# Altium PCB 6S1P-3V.PcbDoc
Units mm, origin at the board's own origin, x right, y up, seen from the top; angles counter-clockwise.
Board outline 74.99 x 72.5 mm, 2 copper layers (Top Layer, Bottom Layer); 9 components, 7 nets, 26 pads, 0 vias.
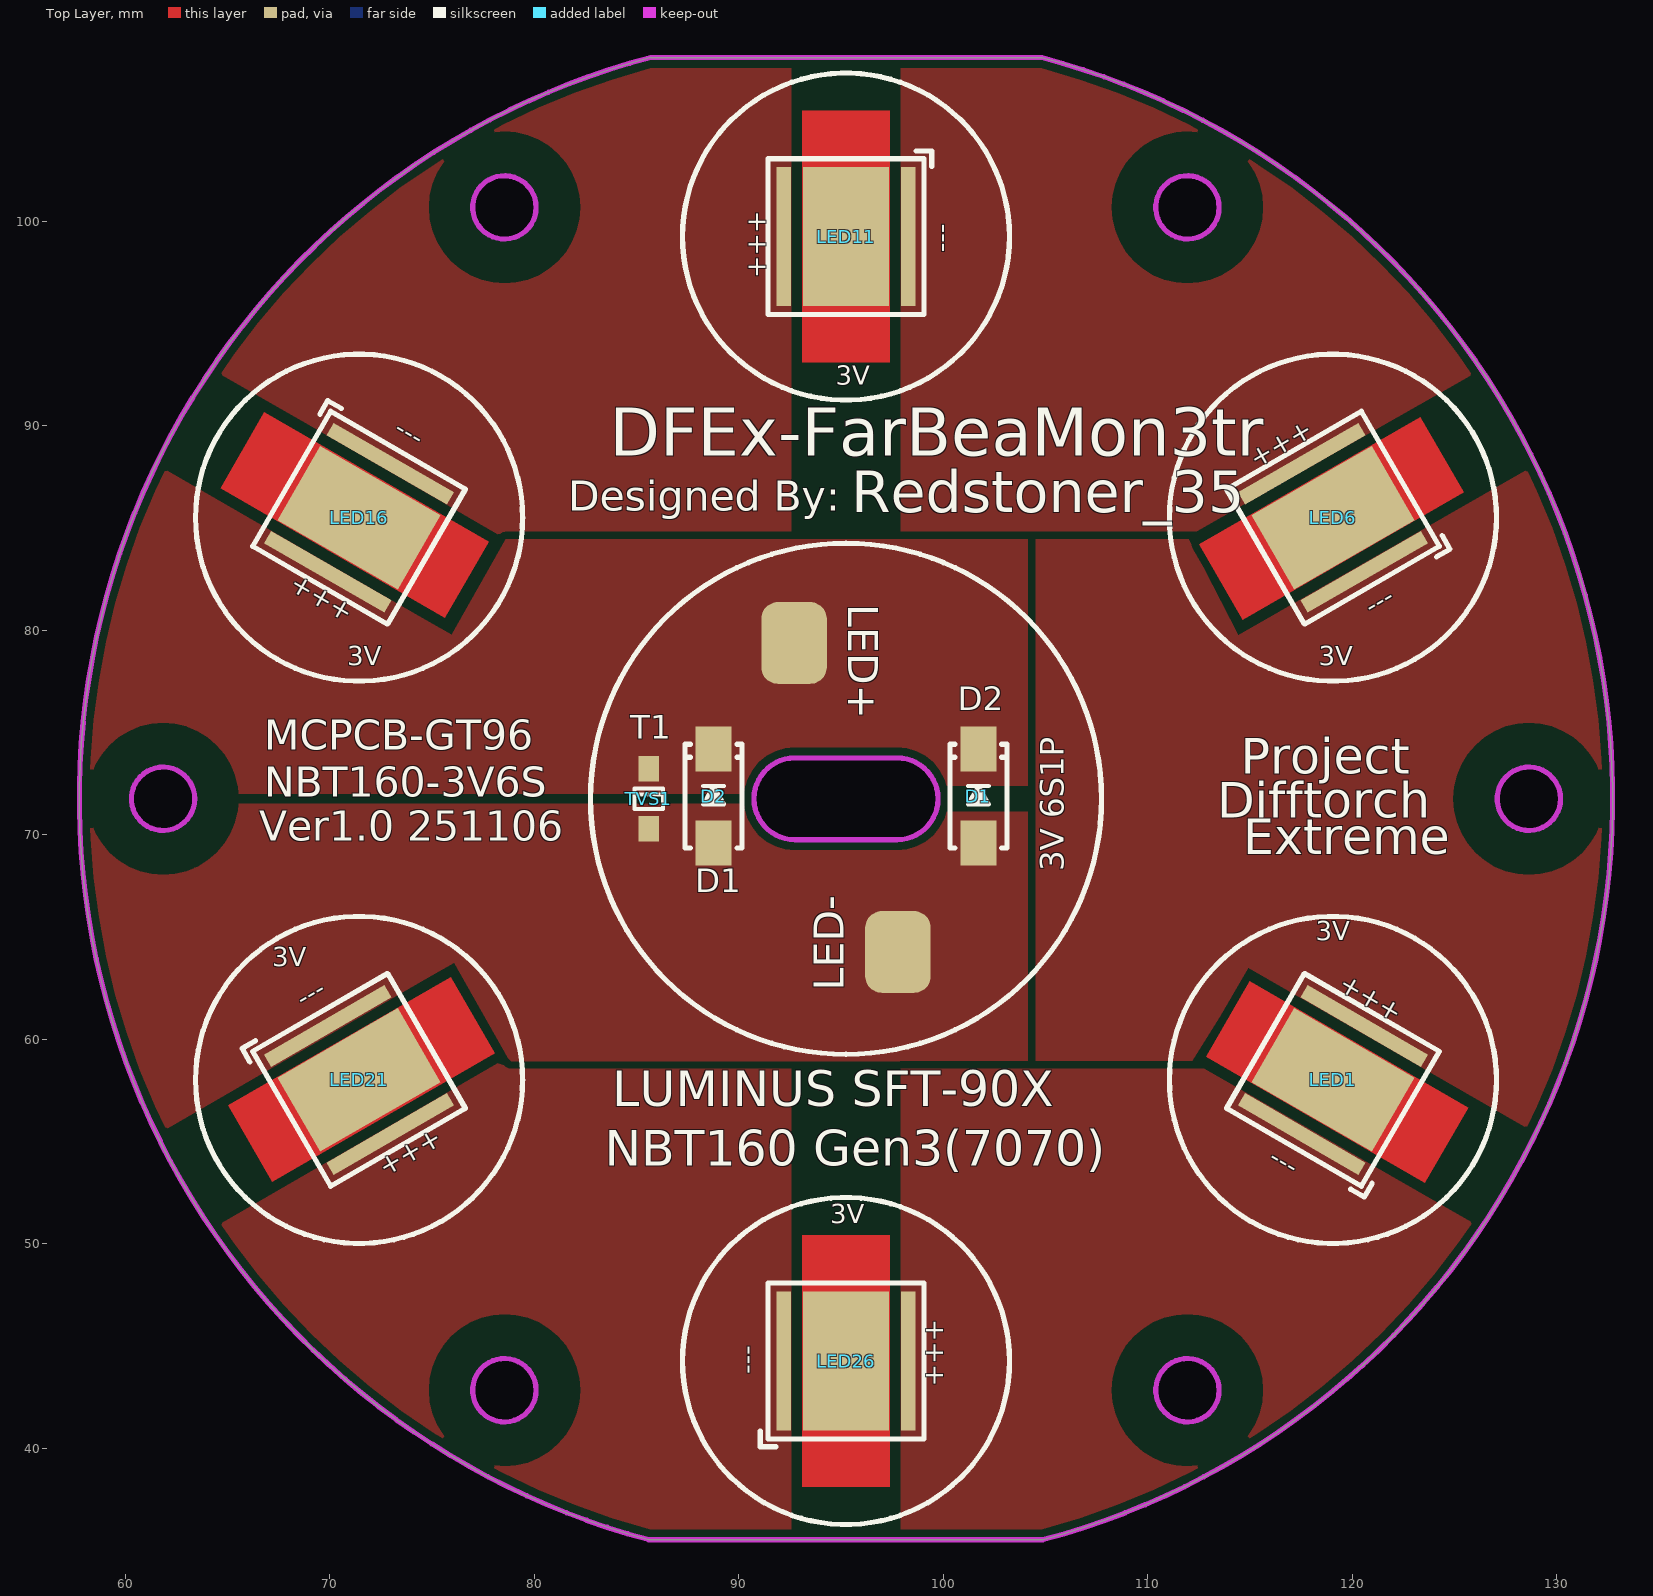
[diagram p0: Top Layer view]
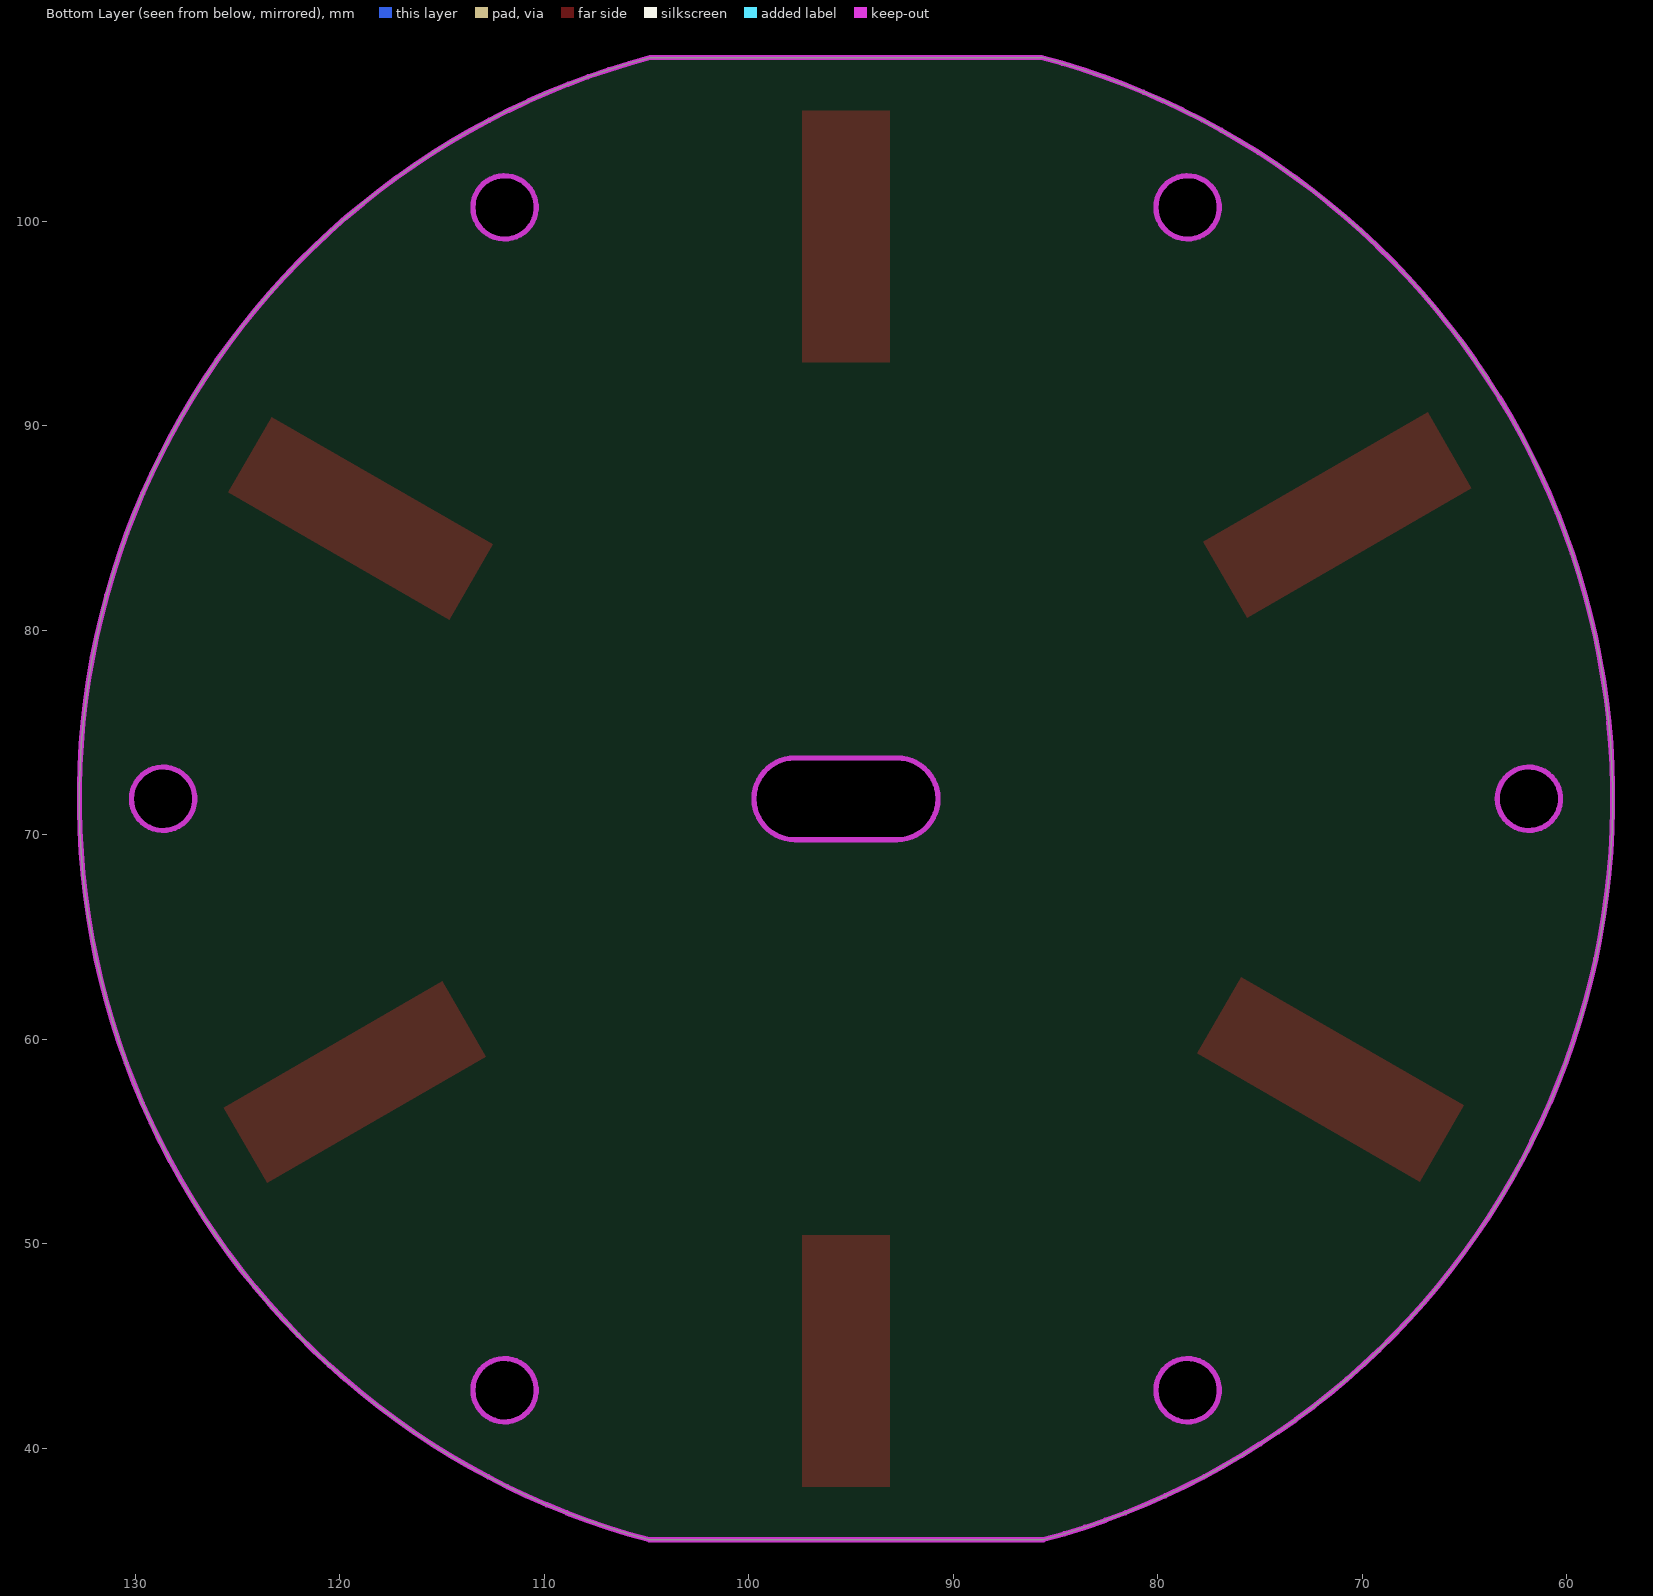
[diagram p1: Bottom Layer view, seen from below]
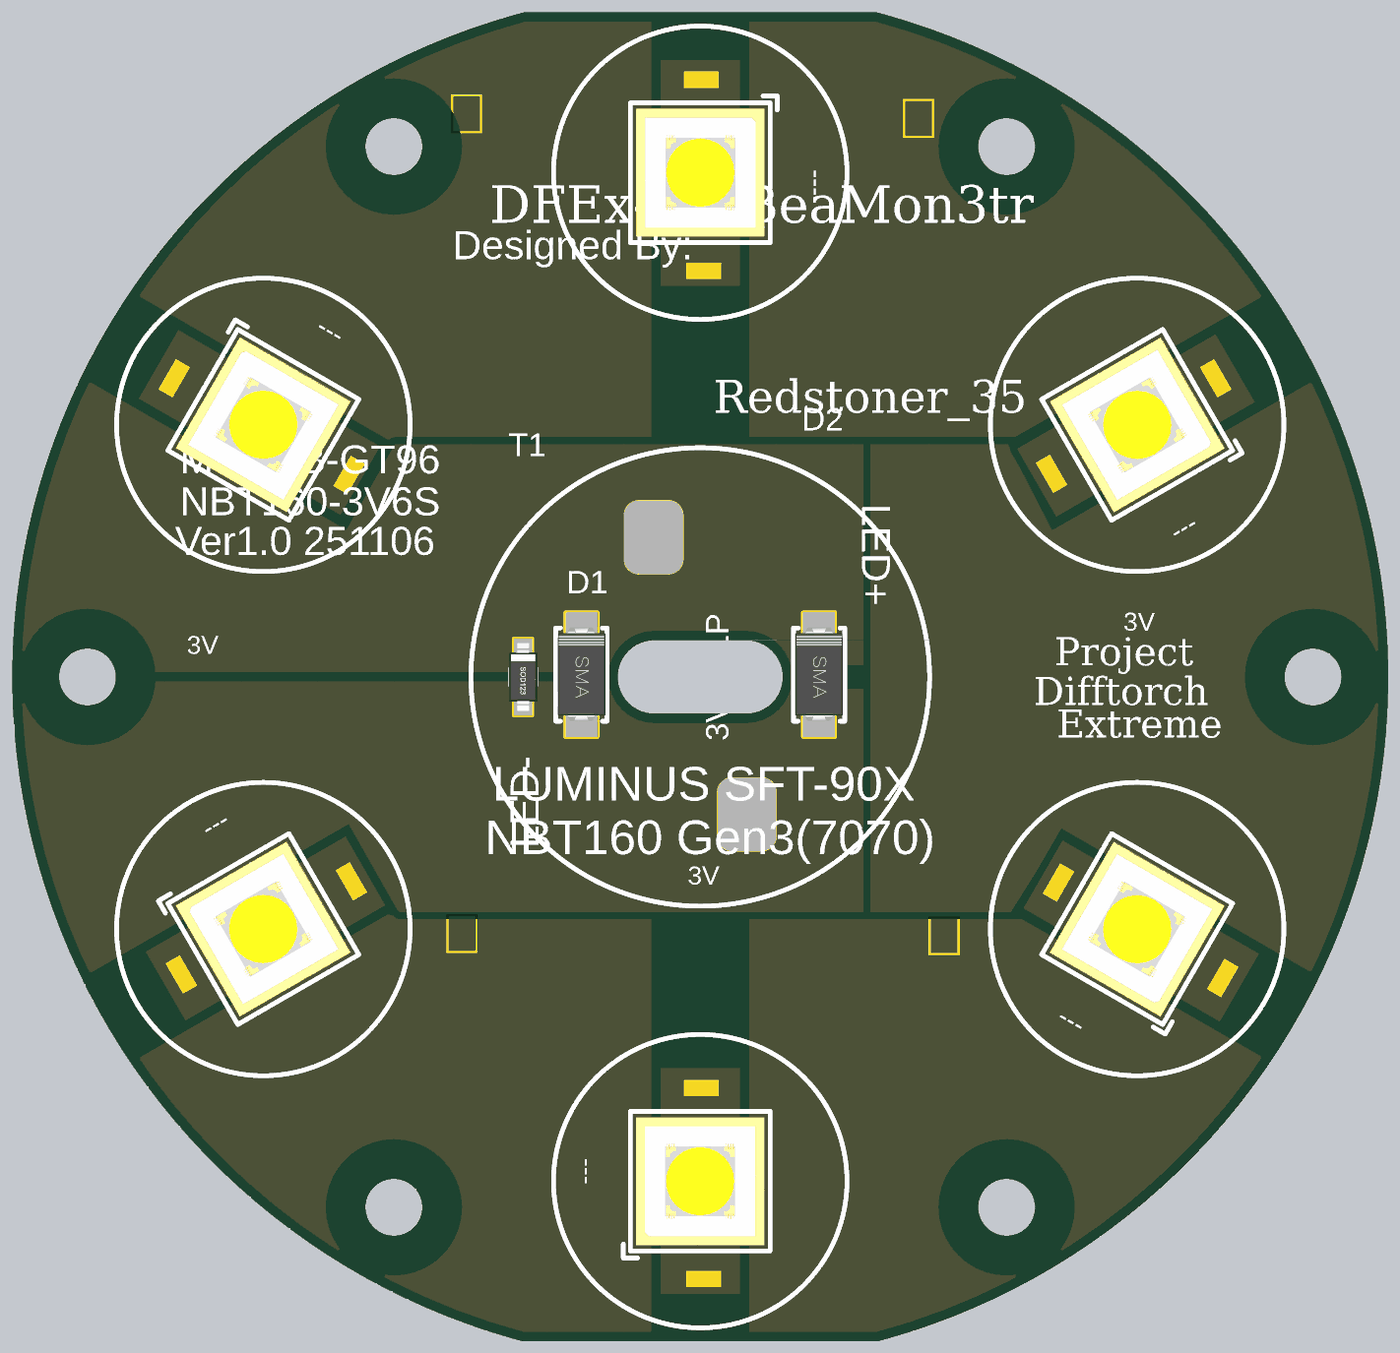
[diagram p2: 3D render of the assembled board from above, using the file's embedded part models]

## Layer stack, top to bottom
Top Solder: solder mask 0.0102, Solder Resist, Dk 3.5
Top Layer: signal copper 0.0356
Dielectric 1: dielectric 0.32, FR-4, Dk 4.8
Bottom Layer: signal copper 0.0356
Bottom Solder: solder mask 0.0102, Solder Resist, Dk 3.5

## Board outline
85.597,35.519 cw(c95.25,71.755) 85.7,108.019 85.7,108.01 104.832,108.01 cw(c95.25,71.755) 104.888,35.515
cut-out: 92.75,69.755 97.75,69.755 ccw(c97.75,71.755) 97.75,73.755 92.75,73.755 ccw(c92.75,71.755)
cut-out: 61.848,70.205 cw(c61.848,71.755) 60.298,71.755 cw(c61.848,71.755) 61.848,73.305 cw(c61.848,71.755) 63.398,71.755 cw(c61.848,71.755)
cut-out: 78.549,99.132 cw(c78.549,100.682) 76.999,100.682 cw(c78.549,100.682) 78.549,102.232 cw(c78.549,100.682) 80.099,100.682 cw(c78.549,100.682)
cut-out: 110.401,100.682 ccw(c111.951,100.682) 111.951,99.132 ccw(c111.951,100.682) 113.501,100.682 ccw(c111.951,100.682) 111.951,102.232 ccw(c111.951,100.682)
cut-out: 127.102,71.755 ccw(c128.652,71.755) 128.652,70.205 ccw(c128.652,71.755) 130.202,71.755 ccw(c128.652,71.755) 128.652,73.305 ccw(c128.652,71.755)
cut-out: 110.401,42.828 ccw(c111.951,42.828) 111.951,41.278 ccw(c111.951,42.828) 113.501,42.828 ccw(c111.951,42.828) 111.951,44.378 ccw(c111.951,42.828)
cut-out: 76.999,42.828 cw(c78.549,42.828) 78.549,44.378 cw(c78.549,42.828) 80.099,42.828 cw(c78.549,42.828) 78.549,41.278 cw(c78.549,42.828)

## Design rules (kind name [scope] priority, off if disabled: settings)
Clearance [All] p1: gap=0.381
PolygonConnect [All] p1: connectstyle=Direct reliefconductorwidth=0.254 reliefentries=4 polygonreliefangle="90 Angle" airgapwidth=0.254
RoutingVias [All] p1: holewidth=0.711 width=1.27 viastyle="Through Hole" minholewidth=0.711 minwidth=1.27 maxholewidth=0.711 maxwidth=1.27
SolderMaskExpansion [All] p1: expansion=0.102
Width [All] p1: maxlimit=0.254 minlimit=0.254 preferedwidth=0.254
30 further rules are at their usual default settings.

## Components (designator, comment, footprint, x,y, rotation, side; value= is the part's Value field where it differs from the comment)
D1 "SS54" SMA 101.727,71.882 r90 top
D2 "SS54" SMA 88.773,71.882 r90 top
LED1 "FV7012I" NBT160.3 119.066,58.005 r60 top
LED6 "FV7012I" NBT160.3 119.066,85.505 r120 top
LED11 "FV7012I" NBT160.3 95.25,99.255 r180 top locked
LED16 "FV7012I" NBT160.3 71.434,85.505 r240 top locked
LED21 "FV7012I" NBT160.3 71.434,58.005 r300 top
LED26 "FV7012I" NBT160.3 95.25,44.255 r0 top locked
TVS1 "SMF24CA" SOD-123 85.598,71.755 r270 top

## Footprints (in the part's own frame and the unit in brackets; to place one, negate y for a bottom-side part, rotate by r counter-clockwise, add the part's x,y. Pads: shape width x height; smd on the part's side, far side on the other; paste and mask are expansions set on the pad)
NBT160.3 [mm] "第三代CREE XHP70 LED，平头HI版本"
  rect 4.2x6.8 smd mask+0.03: 0(0,0)
  rect 0.7x6.8 smd mask+0.03: 1(-3.05,0) 2(3.05,0)
  silkscreen extent -4.19,-4.19 3.81,3.81, body extent -3.51,-3.51 3.49,3.49, height 0.91
SMA [mm] "4.5x2.6*2.2mm（长宽高，不包括引脚）"
  rect 2.2x1.75 smd: 1(-2.3,0) 2(2.3,0)
  silkscreen extent -2.54,-1.4 2.54,1.4, body extent -2.53,-1.3 2.58,1.3, height 2.15
SOD-123 [mm]
  rect 1.25x1 smd: 1(1.475,0) 2(-1.475,0)
  silkscreen extent -0.5,-0.7 0.5,0.7, body extent -1.85,-0.77 1.85,0.78, height 1.35

## Free pads (board coordinates)
  rrect50% 3.2x4 smd mask+0.03: 1(92.71,79.375) 1(97.79,64.262)

## Nets (pads, with @x,y where several pads share a name; then routed paths per layer and width w, separated by ;. In a path a pad name is that pad's centre, name@x,y a point inside that pad or via, vN(x,y) a via of type N, cw(c..) or ccw(c..) an arc to the next point about the centre after c; other vN are vias at no path point)
3V: LED21.2 LED26.1
6V: LED1.1 LED26.2
9V: LED1.2 LED6.1
12V: LED6.2 LED11.1
15V: LED11.2 LED16.1
18V: D1.2 D2.2 LED16.2 pad.1@92.71,79.375 TVS1.2
GND: D1.1 D2.1 LED21.1 pad.1@97.79,64.262 TVS1.1
pads on no net: LED1.0 LED6.0 LED11.0 LED16.0 LED21.0 LED26.0

## Polygon pours and split planes (outlines as drawn)
3V on Top Layer "Component Side-No Net 1" (solid, remove dead copper, pour order 15): 78.226,58.81 68.961,53.465 62.357,49.655 62.23,49.528 62.23,42.67 62.23,34.415 68.453,28.192 69.723,26.922 88.138,26.922 90.297,26.922 92.202,28.827 92.583,29.208 92.583,47.75 92.583,58.672 90.297,58.672 78.74,58.672
GND on Top Layer "Component Side-No Net 1" (solid, remove dead copper, pour order 18): 90.779,71.363 90.641,71.501 87.757,71.501 64.516,71.501 63.119,70.104 63.373,69.85 63.373,64.135 63.373,57.658 63.627,57.404
18V on Top Layer "Component Side-No Net 1" (solid, remove dead copper, pour order 17): 90.322,72.39 90.297,72.365 90.297,72.009 85.598,72.009 85.471,72.009 85.344,72.009 64.008,72.009 64.008,74.295 61.087,77.216 64.516,80.645 64.516,82.55 68.707,82.55 69.215,83.058
15V on Top Layer "Component Side-No Net 1" (solid, remove dead copper, pour order 16): 78.226,84.698 68.961,90.043 62.357,93.853 62.23,93.98 62.23,100.838 62.23,109.093 68.453,115.316 69.723,116.586 88.138,116.586 90.297,116.586 92.202,114.681 92.583,114.3 92.583,95.758 92.583,84.836 90.297,84.836 78.74,84.836
GND on Top Layer "Component Side-No Net 1" (solid, remove dead copper, pour order 13): 104.648,71.12 82.931,71.12 53.721,71.12 53.975,58.801 53.975,56.896 53.975,56.388 54.483,55.88 54.737,55.626 58.293,55.626 61.467,55.717 61.595,55.372 74.803,62.992 76.086,63.732 78.733,59.062 78.867,58.928 104.648,58.928
18V on Top Layer "Component Side-No Net 1" (solid, remove dead copper, pour order 14): 104.521,72.39 82.804,72.39 53.594,72.39 53.848,84.709 53.848,86.614 53.848,87.122 54.356,87.63 54.61,87.884 58.166,87.884 61.34,87.793 61.468,88.138 74.676,80.518 75.959,79.778 78.606,84.448 80.01,84.448 104.528,84.448
9V on Top Layer "Component Side-No Net 1" (solid, remove dead copper, pour order 12): 104.521,84.455 112.014,84.455 114.427,79.756 131.064,89.281 134.112,88.011 134.62,63.373 133.477,55.372 132.715,55.499 130.683,55.499 129.16,55.717 129.032,55.372 114.935,63.5 113.538,61.087 111.379,57.658 102.743,58.039 104.521,68.834 104.521,84.074
6V on Top Layer "Component Side-No Net 1" (solid, remove dead copper, pour order 10): 97.79,35.373 97.917,35.373 97.917,41.529 97.917,57.023 97.917,58.547 99.695,58.547 112.776,58.547 129.159,49.149 129.54,48.641 129.54,35.306 129.54,31.369 129.413,31.242 129.032,30.861 97.663,30.861
12V on Top Layer "Component Side-No Net 1" (solid, remove dead copper, pour order 11): 97.79,108.01 97.917,108.01 97.917,101.854 97.917,84.836 99.441,84.836 112.395,84.836 129.159,94.361 129.54,94.742 129.54,108.077 129.54,112.014 129.413,112.141 129.032,112.522 97.663,112.522

## Keep-outs
Keep-Out Layer:
  circle w0.254: c111.951,100.682 r1.55
  circle w0.254: c78.541,100.682 r1.55
  circle w0.254: c61.848,71.755 r1.55
  circle w0.254: c78.541,42.828 r1.55
  circle w0.254: c111.951,42.828 r1.55
  circle w0.254: c128.652,71.755 r1.55
  lines w0.254: 85.597,35.515 104.888,35.515 ccw(c95.25,71.755) 104.832,108.01 85.7,108.01 ; 85.597,35.519 cw(c95.25,71.755) 85.7,108.019 ; 92.75,69.755 cw(c92.75,71.755) 92.75,73.755 97.75,73.755 cw(c97.75,71.755) 97.75,69.755 92.75,69.755

## Other copper
Top Layer:
  region: 78.076,59.302 75.91,63.054 65.024,56.769 67.19,53.017
  region: 112.522,84.201 114.661,80.497 125.476,86.741 123.337,90.445
  region: 115,62.837 112.866,59.14 123.571,52.959 125.706,56.656
  region: 75.64,80.592 77.798,84.329 66.802,90.678 64.644,86.941
  rectangle: 93.091,38.1 97.409,50.41
  rectangle: 93.091,93.091 97.409,105.41

## Silkscreen, mask and mechanical layers (free items; w line width, h text height)
Top Overlay:
  circle w0.254: c95.25,99.255 r8
  circle w0.254: c119.066,85.505 r8
  circle w0.254: c119.066,58.005 r8
  circle w0.254: c95.25,44.255 r8
  circle w0.254: c71.434,58.005 r8
  circle w0.254: c71.434,85.505 r8
  circle w0.254: c95.25,71.755 r12.5
  text "3V" at 94.742,91.694 h1.6
  text "DFEx-FarBeaMon3tr" at 83.693,87.757 h4
  text "Designed By:" at 81.661,85.344 h2.5
  text "Redstoner_35" at 95.504,85.09 h3.5
  text "LED+" at 94.869,81.28 h2.5 r270
  text "3V" at 70.866,77.978 h1.6
  text "3V" at 118.364,77.978 h1.6
  text "D2" at 100.711,75.692 h2
  text "T1" at 84.709,74.295 h2
  text "MCPCB-GT96" at 66.802,73.66 h2.5
  text "Project" at 114.554,72.39 h3
  text "NBT160-3V6S" at 66.802,71.374 h2.5
  text "Difftorch" at 113.411,70.231 h3
  text "Ver1.0 251106" at 66.548,69.215 h2.5
  text "Extreme" at 114.681,68.453 h3
  text "3V 6S1P" at 106.299,68.199 h2 r90
  text "D1" at 87.884,66.802 h2
  text "3V" at 118.237,64.516 h1.6
  text "3V" at 67.183,63.246 h1.6
  text "LED-" at 95.631,62.357 h2.5 r90
  text "LUMINUS SFT-90X" at 83.82,56.134 h3
  text "NBT160 Gen3(7070)" at 83.439,53.213 h3
  text "3V" at 94.488,50.673 h1.6
Top Solder:
  region: 113.538,83.439 114.49,81.789 115.26,82.234 114.308,83.883
  region: 122.491,88.645 123.444,86.995 124.214,87.44 123.261,89.089
  region: 77.097,60.008 76.144,61.657 75.374,61.213 76.327,59.563
  region: 67.826,54.928 66.873,56.577 66.103,56.133 67.056,54.483
  region: 123.824,56.383 122.871,54.734 123.641,54.289 124.593,55.939
  region: 114.87,61.589 113.918,59.94 114.687,59.495 115.64,61.145
  region: 66.485,86.996 67.437,88.646 66.667,89.09 65.715,87.441
  region: 76.017,81.726 76.97,83.375 76.2,83.82 75.247,82.17
  rectangle: 94.361,48.886 96.266,49.775
  rectangle: 94.488,38.472 96.393,39.361
  rectangle: 94.488,93.472 96.393,94.361
  rectangle: 94.361,103.886 96.266,104.775
  text "烫" at 81.28,92.837 h3.5
  text "屯" at 105.918,92.583 h3.5
  text "烫" at 81.026,48.133 h3.5
  text "屯" at 107.315,48.006 h3.5
Mechanical 1:
  circle w0.254: c128.652,71.755 r3.2
  circle w0.254: c61.848,71.755 r3.2
  circle w0.254: c78.549,100.682 r3.2
  circle w0.254: c111.951,100.682 r3.2
  circle w0.254: c111.951,42.828 r3.2
  circle w0.254: c78.549,42.828 r3.2

## Text inside footprints (layer, text, board x,y; h text height)
LED1: Top Overlay "+++" at 122.706,61.769 h1.65 r150; Top Overlay "---" at 117.584,54.168 h1.65 r150
LED6: Top Overlay "---" at 121.648,82.303 h1.65 r210; Top Overlay "+++" at 117.626,90.539 h1.65 r210
LED11: Top Overlay "+++" at 90.17,100.525 h1.65 r270; Top Overlay "---" at 99.314,99.89 h1.65 r270
LED16: Top Overlay "---" at 72.916,89.342 h1.65 r330; Top Overlay "+++" at 67.794,81.741 h1.65 r330
LED21: Top Overlay "+++" at 72.874,52.971 h1.65 r30; Top Overlay "---" at 68.852,61.207 h1.65 r30
LED26: Top Overlay "---" at 91.186,43.62 h1.65 r90; Top Overlay "+++" at 100.33,42.985 h1.65 r90